# Altium PCB PCB 0901.PcbDoc (part 2 of 3)
Units mm, origin at the board's own origin, x right, y up, seen from the top; angles counter-clockwise.
Board outline 234.06 x 185.93 mm, 2 copper layers (Top Layer, Bottom Layer); 162 components, 256 nets, 1015 pads, 205 vias.
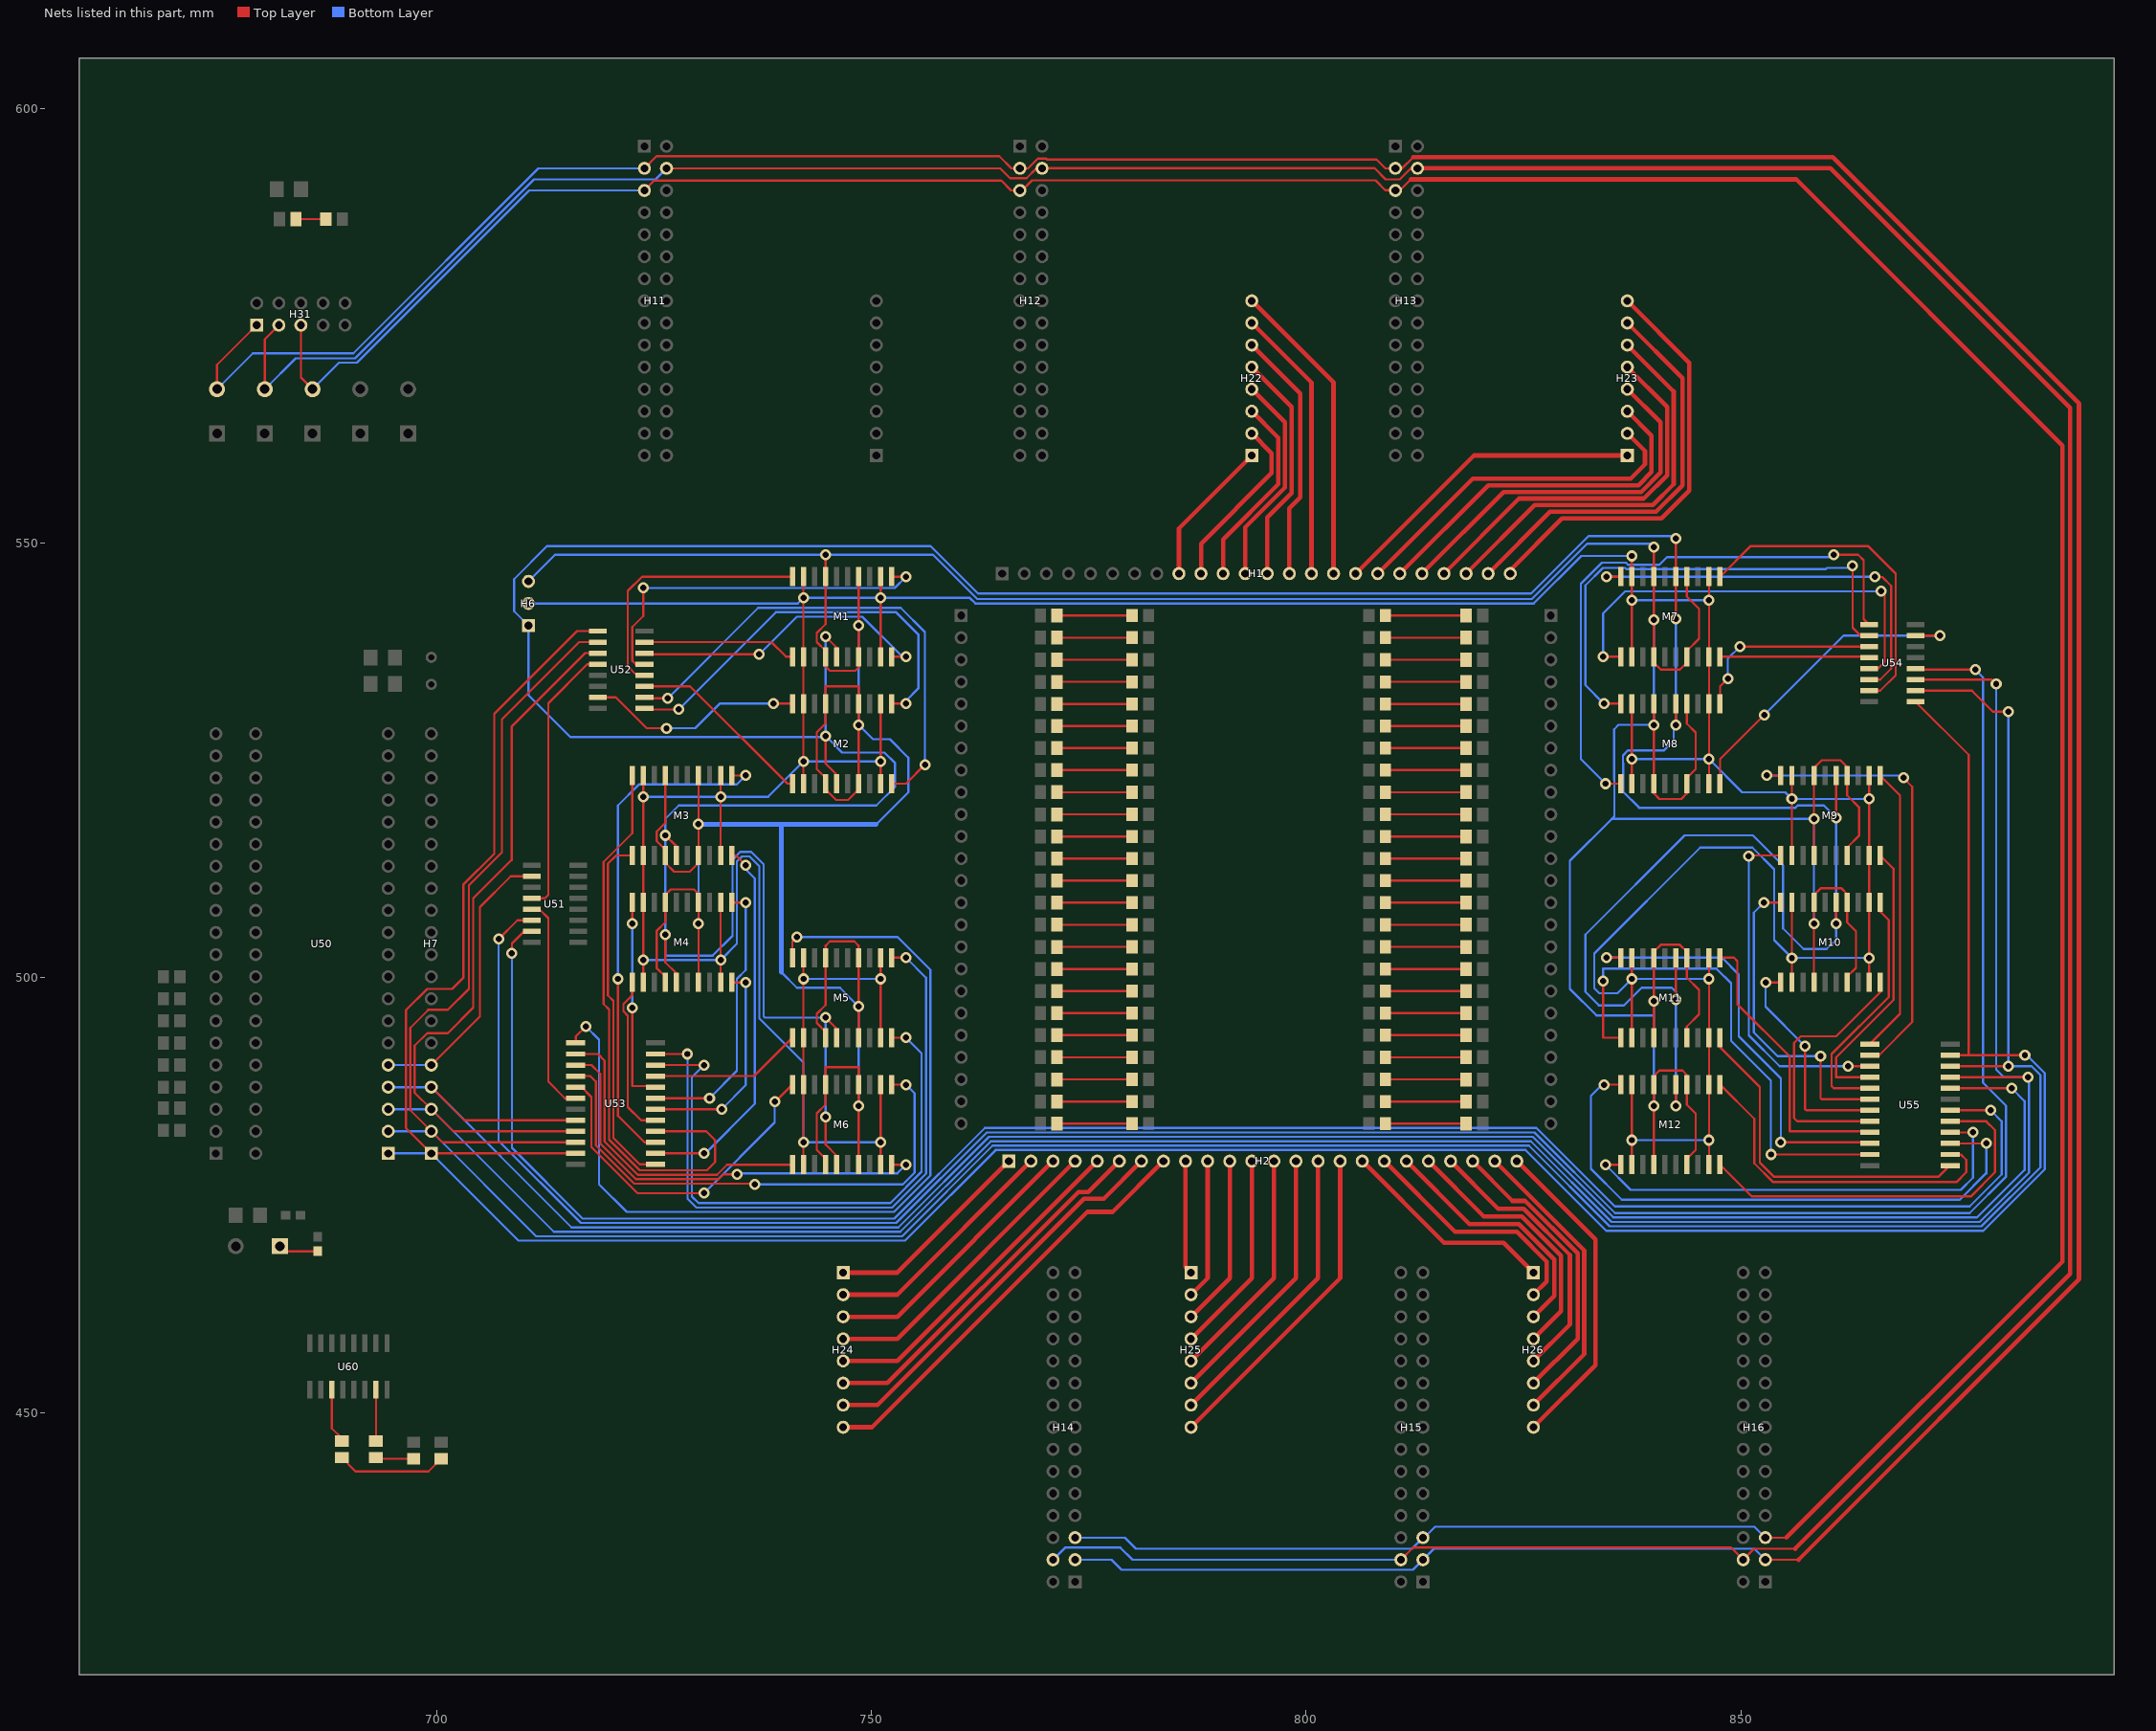
[diagram p2: the nets of this part, all layers, seen from the top]

## Via types
v1: diameter 1.27, hole 0.711, Top Layer to Bottom Layer, 205 vias

## Nets (pads, with @x,y where several pads share a name; then routed paths per layer and width w, separated by ;. In a path a pad name is that pad's centre, name@x,y a point inside that pad or via, vN(x,y) a via of type N, cw(c..) or ccw(c..) an arc to the next point about the centre after c; other vN are vias at no path point) (continued)
IN9: H1.9 H22.1 | length 17.1
  Top Layer w0.508: H1.9@785.368,546.481 785.368,551.687 H22.1@793.751,560.07
IN10: H1.10 H22.2 | length 20.4
  Top Layer w0.508: H1.10@787.908,546.481 787.908,549.91 796.036,558.038 796.036,560.325 H22.2@793.751,562.61
IN11: H1.11 H22.3 | length 22.6
  Top Layer w0.508: H1.11@790.448,546.481 790.448,550.418 796.798,556.768 796.798,562.103 H22.3@793.751,565.15
IN12: H1.12 H22.4 | length 24.7
  Top Layer w0.508: H1.12@792.988,546.481 792.988,551.815 797.56,556.387 797.56,563.881 H22.4@793.751,567.69
IN13: H1.13 H22.5 | length 26.8
  Top Layer w0.508: H22.5@793.751,570.23 798.322,565.659 798.322,555.752 795.528,552.958 H1.13@795.528,546.481
IN14: H1.14 H22.6 | length 29.1
  Top Layer w0.508: H22.6@793.751,572.77 799.338,567.183 799.338,555.244 798.068,553.974 H1.14@798.068,546.481
IN15: H1.15 H22.7 | length 31.7
  Top Layer w0.508: H22.7@793.751,575.31 800.608,568.453 H1.15@800.608,546.481
IN16: H1.16 H22.8 | length 35.3
  Top Layer w0.508: H22.8@793.751,577.85 803.148,568.453 H1.16@803.148,546.481
IN17: H1.17 H23.1 | length 36.9
  Top Layer w0.508: H1.17@805.688,546.481 819.277,560.07 H23.1@836.93,560.07
IN18: H1.18 H23.2 | length 40.3
  Top Layer w0.508: H1.18@808.228,546.481 819.15,557.403 837.311,557.403 838.962,559.054 838.962,560.578 H23.2@836.93,562.61
IN19: H1.19 H23.3 | length 41.9
  Top Layer w0.508: H1.19@810.768,546.481 820.928,556.641 838.2,556.641 839.724,558.165 839.724,562.356 H23.3@836.93,565.15
IN20: H1.20 H23.4 | length 43.4
  Top Layer w0.508: H1.20@813.308,546.481 822.706,555.879 838.519,555.879 840.74,558.1 840.74,563.88 H23.4@836.93,567.69
IN21: H1.21 H23.5 | length 44.7
  Top Layer w0.508: H1.21@815.848,546.481 824.484,555.117 838.835,555.117 841.502,557.784 841.502,565.658 H23.5@836.93,570.23
IN22: H1.22 H23.6 | length 46.3
  Top Layer w0.508: H1.22@818.388,546.481 826.262,554.355 839.851,554.355 842.264,556.768 842.264,567.436 H23.6@836.93,572.77
IN23: H1.23 H23.7 | length 47.9
  Top Layer w0.508: H1.23@820.928,546.481 828.04,553.593 840.232,553.593 843.28,556.641 843.28,568.96 H23.7@836.93,575.31
IN24: H1.24 H23.8 | length 49.5
  Top Layer w0.508: H1.24@823.468,546.481 823.468,546.862 829.437,552.831 840.867,552.831 844.042,556.006 844.042,570.738 H23.8@836.93,577.85
IN25: H2.1 H24.1 | length 24.4
  Top Layer w0.508: H24.1@746.754,466.096 752.989,466.096 H2.1@765.81,478.917
IN26: H2.2 H24.2 | length 28
  Top Layer w0.508: H24.2@746.754,463.556 752.989,463.556 H2.2@768.35,478.917
IN27: H2.3 H24.3 | length 31.6
  Top Layer w0.508: H24.3@746.754,461.016 752.989,461.016 H2.3@770.89,478.917
IN28: H2.4 H24.4 | length 35.1
  Top Layer w0.508: H24.4@746.754,458.476 752.989,458.476 H2.4@773.43,478.917
IN29: H2.5 H24.5 | length 38.7
  Top Layer w0.508: H24.5@746.754,455.936 752.989,455.936 H2.5@775.97,478.917
IN30: H2.6 H24.6 | length 42.3
  Top Layer w0.508: H24.6@746.754,453.396 751.846,453.396 773.811,475.361 774.954,475.361 H2.6@778.51,478.917
IN31: H2.7 H24.7 | length 45.9
  Top Layer w0.508: H24.7@746.754,450.856 750.703,450.856 774.446,474.599 776.732,474.599 H2.7@781.05,478.917
IN32: H2.8 H24.8 | length 49.5
  Top Layer w0.508: H24.8@746.754,448.316 750.068,448.316 774.827,473.075 777.748,473.075 H2.8@783.59,478.917
IN33: H2.9 H25.1 | length 13.1
  Top Layer w0.508: H2.9@786.13,478.917 786.13,466.725 H25.1@786.759,466.096
IN34: H2.10 H25.2 | length 16.2
  Top Layer w0.508: H25.2@786.759,463.556 788.67,465.468 H2.10@788.67,478.917
IN35: H2.11 H25.3 | length 19.7
  Top Layer w0.508: H25.3@786.759,461.016 791.21,465.468 H2.11@791.21,478.917
IN36: H2.12 H25.4 | length 23.3
  Top Layer w0.508: H25.4@786.759,458.476 793.75,465.468 H2.12@793.75,478.917
IN37: H2.13 H25.5 | length 26.9
  Top Layer w0.508: H25.5@786.759,455.936 796.29,465.468 H2.13@796.29,478.917
IN38: H2.14 H25.6 | length 30.5
  Top Layer w0.508: H25.6@786.759,453.396 798.83,465.468 H2.14@798.83,478.917
IN39: H2.15 H25.7 | length 34.1
  Top Layer w0.508: H25.7@786.759,450.856 801.37,465.468 H2.15@801.37,478.917
IN40: H2.16 H25.8 | length 37.7
  Top Layer w0.508: H25.8@786.759,448.316 803.91,465.468 H2.16@803.91,478.917
IN41: H2.17 H26.1 | length 25
  Top Layer w0.508: H2.17@806.45,478.917 815.848,469.519 822.706,469.519 H26.1@826.129,466.096
IN42: H2.18 H26.2 | length 27.9
  Top Layer w0.508: H2.18@808.99,478.917 817.118,470.789 824.23,470.789 827.659,467.36 827.659,465.087 H26.2@826.129,463.556
IN43: H2.19 H26.3 | length 29.3
  Top Layer w0.508: H2.19@811.53,478.917 818.769,471.678 824.484,471.678 828.548,467.614 828.548,463.436 H26.3@826.129,461.016
IN44: H2.20 H26.4 | length 30.6
  Top Layer w0.508: H2.20@814.07,478.917 820.42,472.567 824.807,472.567 829.31,468.064 829.31,461.658 H26.4@826.129,458.476
IN45: H2.21 H26.5 | length 32.1
  Top Layer w0.508: H2.21@816.61,478.917 822.071,473.456 824.996,473.456 830.326,468.126 830.326,460.134 H26.5@826.129,455.936
IN46: H2.22 H26.6 | length 33.5
  Top Layer w0.508: H2.22@819.15,478.917 823.722,474.345 825.184,474.345 831.215,468.314 831.215,458.483 H26.6@826.129,453.396
IN47: H2.23 H26.7 | length 34.7
  Top Layer w0.508: H2.23@821.69,478.917 831.977,468.63 831.977,456.705 H26.7@826.129,450.856
IN48: H2.24 H26.8 | length 37.3
  Top Layer w0.508: H2.24@824.23,478.917 833.247,469.9 833.247,455.435 H26.8@826.129,448.316
NetDS1_2: DS1.2 R51.1 | length 8.6
  Top Layer w0.254: DS1.2@771.332,541.655 R51.1@779.973,541.655
NetDS2_2: DS2.2 R52.1 | length 9.3
  Top Layer w0.254: R52.1@809.117,541.655 DS2.2@818.393,541.655
NetDS3_2: DS3.2 R53.1 | length 8.6
  Top Layer w0.254: DS3.2@771.332,539.115 R53.1@779.973,539.115
NetDS4_2: DS4.2 R54.1 | length 9.3
  Top Layer w0.254: R54.1@809.117,539.115 DS4.2@818.393,539.115
NetDS5_2: DS5.2 R55.1 | length 8.6
  Top Layer w0.254: DS5.2@771.332,536.575 R55.1@779.973,536.575
NetDS6_2: DS6.2 R56.1 | length 9.3
  Top Layer w0.254: R56.1@809.117,536.575 DS6.2@818.393,536.575
NetDS7_2: DS7.2 R57.1 | length 8.6
  Top Layer w0.254: DS7.2@771.332,534.035 R57.1@779.973,534.035
NetDS8_2: DS8.2 R58.1 | length 9.3
  Top Layer w0.254: R58.1@809.244,534.035 DS8.2@818.52,534.035
NetDS9_2: DS9.2 R59.1 | length 8.6
  Top Layer w0.254: DS9.2@771.332,531.495 R59.1@779.973,531.495
NetDS10_2: DS10.2 R60.1 | length 9.3
  Top Layer w0.254: R60.1@809.117,531.495 DS10.2@818.393,531.495
NetDS11_2: DS11.2 R61.1 | length 8.6
  Top Layer w0.254: DS11.2@771.332,528.955 R61.1@779.973,528.955
NetDS12_2: DS12.2 R62.1 | length 9.3
  Top Layer w0.254: R62.1@809.117,528.955 DS12.2@818.393,528.955
NetDS13_2: DS13.2 R63.1 | length 8.6
  Top Layer w0.254: DS13.2@771.332,526.415 R63.1@779.973,526.415
NetDS14_2: DS14.2 R64.1 | length 9.3
  Top Layer w0.254: R64.1@809.244,526.415 DS14.2@818.52,526.415
NetDS15_2: DS15.2 R65.1 | length 8.6
  Top Layer w0.254: DS15.2@771.332,523.875 R65.1@779.973,523.875
NetDS16_2: DS16.2 R66.1 | length 9.3
  Top Layer w0.254: R66.1@809.117,523.875 DS16.2@818.393,523.875
NetDS17_2: DS17.2 R67.1 | length 8.6
  Top Layer w0.254: DS17.2@771.332,521.335 R67.1@779.973,521.335
NetDS18_2: DS18.2 R68.1 | length 9.3
  Top Layer w0.254: R68.1@809.117,521.335 DS18.2@818.393,521.335
NetDS19_2: DS19.2 R69.1 | length 8.6
  Top Layer w0.254: DS19.2@771.332,518.795 R69.1@779.973,518.795
NetDS20_2: DS20.2 R70.1 | length 9.3
  Top Layer w0.254: R70.1@809.244,518.795 DS20.2@818.52,518.795
NetDS21_2: DS21.2 R71.1 | length 8.6
  Top Layer w0.254: DS21.2@771.332,516.255 R71.1@779.973,516.255
NetDS22_2: DS22.2 R72.1 | length 9.3
  Top Layer w0.254: R72.1@809.117,516.255 DS22.2@818.393,516.255
NetDS23_2: DS23.2 R73.1 | length 8.6
  Top Layer w0.254: DS23.2@771.332,513.715 R73.1@779.973,513.715
NetDS24_2: DS24.2 R74.1 | length 9.3
  Top Layer w0.254: R74.1@809.117,513.715 DS24.2@818.393,513.715
NetDS25_2: DS25.2 R75.1 | length 8.6
  Top Layer w0.254: DS25.2@771.332,511.175 R75.1@779.973,511.175
NetDS26_2: DS26.2 R76.1 | length 9.3
  Top Layer w0.254: R76.1@809.117,511.175 DS26.2@818.393,511.175
NetDS27_2: DS27.2 R77.1 | length 8.6
  Top Layer w0.254: DS27.2@771.332,508.635 R77.1@779.973,508.635
NetDS28_2: DS28.2 R78.1 | length 9.3
  Top Layer w0.254: R78.1@809.117,508.635 DS28.2@818.393,508.635
NetDS29_2: DS29.2 R79.1 | length 8.6
  Top Layer w0.254: DS29.2@771.332,506.095 R79.1@779.973,506.095
NetDS30_2: DS30.2 R80.1 | length 9.3
  Top Layer w0.254: R80.1@809.117,506.095 DS30.2@818.393,506.095
NetDS31_2: DS31.2 R81.1 | length 8.6
  Top Layer w0.254: DS31.2@771.332,503.555 R81.1@779.973,503.555
NetDS32_2: DS32.2 R82.1 | length 9.3
  Top Layer w0.254: R82.1@809.117,503.555 DS32.2@818.393,503.555
NetDS33_2: DS33.2 R83.1 | length 8.6
  Top Layer w0.254: DS33.2@771.332,501.015 R83.1@779.973,501.015
NetDS34_2: DS34.2 R84.1 | length 9.3
  Top Layer w0.254: R84.1@809.117,501.015 DS34.2@818.393,501.015
NetDS35_2: DS35.2 R85.1 | length 8.6
  Top Layer w0.254: DS35.2@771.332,498.475 R85.1@779.973,498.475
NetDS36_2: DS36.2 R86.1 | length 9.3
  Top Layer w0.254: R86.1@809.117,498.475 DS36.2@818.393,498.475
NetDS37_2: DS37.2 R87.1 | length 8.6
  Top Layer w0.254: DS37.2@771.332,495.935 R87.1@779.973,495.935
NetDS38_2: DS38.2 R88.1 | length 9.3
  Top Layer w0.254: R88.1@809.117,495.935 DS38.2@818.393,495.935
NetDS39_2: DS39.2 R89.1 | length 8.6
  Top Layer w0.254: DS39.2@771.332,493.395 R89.1@779.973,493.395
NetDS40_2: DS40.2 R90.1 | length 9.3
  Top Layer w0.254: R90.1@809.117,493.395 DS40.2@818.393,493.395
NetDS41_2: DS41.2 R91.1 | length 8.6
  Top Layer w0.254: DS41.2@771.332,490.855 R91.1@779.973,490.855
NetDS42_2: DS42.2 R92.1 | length 9.3
  Top Layer w0.254: R92.1@809.117,490.855 DS42.2@818.393,490.855
NetDS43_2: DS43.2 R93.1 | length 8.6
  Top Layer w0.254: DS43.2@771.332,488.315 R93.1@779.973,488.315
NetDS44_2: DS44.2 R94.1 | length 9.3
  Top Layer w0.254: R94.1@809.244,488.315 DS44.2@818.52,488.315
NetDS45_2: DS45.2 R95.1 | length 8.6
  Top Layer w0.254: DS45.2@771.332,485.775 R95.1@779.973,485.775
NetDS46_2: DS46.2 R96.1 | length 9.3
  Top Layer w0.254: R96.1@808.99,485.775 DS46.2@818.266,485.775
NetDS47_2: DS47.2 R97.1 | length 8.6
  Top Layer w0.254: DS47.2@771.332,483.235 R97.1@779.973,483.235
NetDS48_2: DS48.2 R98.1 | length 9.3
  Top Layer w0.254: R98.1@809.244,483.235 DS48.2@818.52,483.235
NetDS50_1: DS50.1 R20.1 | length 4.2
  Top Layer w0.254: DS50.1@693.166,444.693 R20.1@697.357,444.693
NetDS50_2: DS50.2 U60.15 | length 5.9
  Top Layer w0.254: DS50.2@693.039,446.72 U60.15@693.039,452.62
NetDS54_1: DS54.1 R24.1 | length 12.7
  Top Layer w0.254: DS54.1@689.102,444.82 690.692,443.23 699.069,443.23 R24.1@700.532,444.693
NetDS54_2: DS54.2 U60.11 | length 6.4
  Top Layer w0.254: U60.11@687.959,452.62 687.959,448.183 689.102,447.04 DS54.2@689.102,446.72
NetDS55_2: DS55.2 R31.2 | length 3.4
  Top Layer w0.254: DS55.2@683.829,587.248 R31.2@687.263,587.248
NetH6_1: H6.1 M1.5 M2.5 M3.5 M4.5 M5.5 M6.5 M7.5 M8.5 M9.5 M10.5 M11.5 M12.5 | length 508.4
  Top Layer w0.254: v1(726.313,504.952) 726.313,501.777 727.583,500.507 M4.5@727.583,499.463 ; v1(726.313,516.382) 727.583,515.112 M3.5@727.583,514.068 ; v1(744.728,483.997) 744.728,480.822 745.998,479.552 M6.5@745.998,478.508 ; v1(744.728,495.427) 745.998,494.157 M5.5@745.998,493.113 ; v1(744.728,527.812) 744.728,524.637 745.998,523.367 M2.5@745.998,522.323 ; v1(744.728,539.242) 745.998,537.972 M1.5@745.998,536.928 ; v1(842.518,485.267) M12.5@842.518,487.708 ; v1(842.518,497.459) M11.5@842.518,502.313 ; v1(842.518,529.082) M8.5@842.518,531.523 ; v1(842.518,541.274) M7.5@842.518,546.128 v1(842.518,550.545) ; v1(860.933,506.222) M10.5@860.933,508.663 ; v1(860.933,518.414) M9.5@860.933,523.268
  Bottom Layer w0.254: v1(744.728,483.997) v1(744.728,495.427) 737.743,495.427 737.616,495.554 737.616,513.048 736.187,514.477 734.925,514.477 734.032,513.584 734.032,504.837 731.734,502.539 726.44,502.539 726.313,502.666 v1(726.313,504.952) v1(726.313,516.382) 726.313,518.287 727.837,519.811 750.57,519.811 752.729,521.97 752.729,524.677 751.499,525.907 746.633,525.907 v1(744.728,527.812) ; v1(744.728,539.242) v1(744.728,527.812) ; v1(842.518,485.267) v1@842.518,497.332 ; v1(842.518,497.459) 842.518,498.392 842.054,498.856 838.577,498.856 836.545,496.824 833.668,496.824 832.104,498.388 832.104,504.952 843.534,516.382 851.361,516.382 854.837,512.906 854.837,505.67 857.206,503.301 859.834,503.301 860.933,504.4 v1(860.933,506.222) v1@860.933,518.287 ; v1@842.518,541.147 v1(842.518,529.082) 842.264,528.828 842.264,527.264 841.161,526.161 837.017,526.161 836.422,525.566 836.422,524.724 836.45,524.696 836.45,521.394 838.287,519.557 856.274,519.557 856.528,519.811 859.536,519.811 v1(860.933,518.414) ; v1(842.518,550.545) 842.264,550.799 832.481,550.799 825.877,544.195 762.258,544.195 756.797,549.656 712.724,549.656 708.914,545.846 708.914,542.163 H6.1@710.565,540.512 710.565,532.511 715.391,527.685 744.601,527.685 v1(744.728,527.812)
NetH6_2: H6.2 M1.2 M1.9 M1.12 M1.19 M2.2 M2.9 M2.12 M2.19 M3.2 M3.9 M3.12 M3.19 M4.2 M4.9 M4.12 M4.19 M5.2 M5.9 M5.12 M5.19 M6.2 M6.9 M6.12 M6.19 M7.2 M7.9 M7.12 M7.19 M8.2 M8.9 M8.12 M8.19 M9.2 M9.9 M9.12 M9.19 M10.2 M10.9 M10.12 M10.19 M11.2 M11.9 M11.12 M11.19 M12.2 M12.9 M12.12 M12.19 | length 601.7
  Top Layer w0.254: M4.2@723.773,499.463 v1(723.773,502.031) M4.19@723.773,508.663 M3.2@723.773,514.068 v1(723.773,520.827) M3.19@723.773,523.268 ; M4.9@732.663,499.463 v1(732.663,502.031) M4.12@732.663,508.663 ; M3.9@732.663,514.068 v1(732.663,520.827) M3.12@732.663,523.268 ; M6.2@742.188,478.508 v1(742.188,481.076) M6.19@742.188,487.708 M5.2@742.188,493.113 v1(742.188,499.872) M5.19@742.188,502.313 ; M2.2@742.188,522.323 v1(742.188,524.891) M2.19@742.188,531.523 M1.2@742.188,536.928 v1(742.188,543.687) M1.19@742.188,546.128 ; M6.9@751.078,478.508 v1(751.078,481.076) M6.12@751.078,487.708 ; M5.9@751.078,493.113 v1(751.078,499.872) M5.12@751.078,502.313 ; M2.9@751.078,522.323 v1(751.078,524.891) M2.12@751.078,531.523 ; M1.9@751.078,536.928 v1(751.078,543.687) M1.12@751.078,546.128 ; M12.12@837.438,478.508 v1(837.438,481.33) M12.9@837.438,487.708 ; M11.12@837.438,493.113 v1(837.438,499.872) M11.9@837.438,502.313 ; M8.12@837.438,522.323 v1(837.438,525.145) M8.9@837.438,531.523 ; M7.12@837.438,536.928 v1(837.438,543.433) M7.9@837.438,546.128 v1(837.438,548.513) ; M12.19@846.328,478.508 v1(846.328,481.33) M12.2@846.328,487.708 M11.19@846.328,493.113 v1(846.328,499.872) M11.2@846.328,502.313 ; M8.19@846.328,522.323 v1(846.328,525.145) M8.2@846.328,531.523 M7.19@846.328,536.928 v1(846.328,543.433) M7.2@846.328,546.1 ; M10.12@855.853,499.463 v1(855.853,502.285) M10.9@855.853,508.663 ; M9.12@855.853,514.068 v1(855.853,520.573) M9.9@855.853,523.268 ; M10.19@864.743,499.463 v1(864.743,502.285) M9.19@864.743,514.068 v1(864.743,520.573) M9.2@864.743,523.268
  Bottom Layer w0.254: H6.2@710.819,543.052 741.553,543.052 v1(742.188,543.687) v1(751.078,543.687) 761.329,543.687 761.964,543.052 826.171,543.052 831.632,548.513 v1(837.438,548.513) ; v1(723.773,502.031) v1(732.663,502.031) 734.54,503.908 734.54,513.374 735.135,513.969 735.977,513.969 737.108,512.838 737.108,495.344 742.188,490.264 v1(742.188,481.076) v1(751.078,481.076) ; v1(723.773,520.827) v1(732.663,520.827) 738.124,520.827 v1(742.188,524.891) v1(751.078,524.891) ; v1(742.188,499.872) v1(751.078,499.872) ; v1(837.438,481.33) v1(846.328,481.33) ; v1(837.438,525.145) v1(846.328,525.145) 850.138,521.335 855.091,521.335 v1(855.853,520.573) v1(864.743,520.573) ; v1(837.438,543.433) v1(846.328,543.433) ; v1(846.328,499.872) v1(837.438,499.872) 835.787,498.221 833.708,498.221 833.12,498.809 833.12,502.793 845.312,514.985 851.321,514.985 853.821,512.485 853.821,504.317 v1(855.853,502.285) v1(864.743,502.285)
NetH6_3: H6.3 M1.4 M1.7 M1.14 M1.17 M2.4 M2.7 M2.14 M2.17 M3.4 M3.7 M3.14 M3.17 M4.4 M4.7 M4.14 M4.17 M5.4 M5.7 M5.14 M5.17 M6.4 M6.7 M6.14 M6.17 M7.4 M7.7 M7.14 M7.17 M8.4 M8.7 M8.14 M8.17 M9.4 M9.7 M9.14 M9.17 M10.4 M10.7 M10.14 M10.17 M11.4 M11.7 M11.14 M11.17 M12.4 M12.7 M12.14 M12.17 | length 662.8
  Top Layer w0.254: M4.4@726.313,499.463 726.313,500.132 725.297,501.148 725.297,505.373 726.313,506.389 M4.17@726.313,508.663 726.313,509.524 726.948,510.159 729.615,510.159 730.123,509.651 M4.14@730.123,508.663 v1(730.123,506.222) M4.7@730.123,499.463 ; M3.17@726.313,523.268 726.313,517.819 725.297,516.803 725.297,515.753 726.313,514.737 M3.4@726.313,514.068 726.313,513.207 727.329,512.191 729.107,512.191 730.123,513.207 M3.7@730.123,514.068 v1(730.123,517.652) M3.14@730.123,523.268 ; M6.4@744.728,478.508 744.728,479.177 743.712,480.193 743.712,484.418 744.728,485.434 M6.17@744.728,487.708 744.728,489.712 748.538,489.712 M6.14@748.538,487.708 v1(748.538,485.267) M6.7@748.538,478.508 ; M5.4@744.728,493.113 744.728,493.782 743.712,494.798 743.712,495.848 744.728,496.864 M5.17@744.728,502.313 744.728,503.682 745.236,504.19 748.03,504.19 748.538,503.682 M5.14@748.538,502.313 v1(748.538,496.697) M5.7@748.538,493.113 ; v1(744.728,548.64) M1.17@744.728,546.128 744.728,540.679 743.712,539.663 743.712,538.613 744.728,537.597 M1.4@744.728,536.928 744.728,535.813 745.236,535.305 748.157,535.305 748.538,535.686 M1.7@748.538,536.928 v1(748.538,540.512) M1.14@748.538,546.128 ; M12.14@839.978,478.508 v1(839.978,485.267) M12.7@839.978,487.708 839.978,488.696 840.613,489.331 843.28,489.331 843.788,488.823 M12.4@843.788,488.377 ; M11.14@839.978,493.113 v1(839.978,497.332) M11.7@839.978,502.313 839.978,502.982 840.79,503.794 842.976,503.794 843.788,502.982 M11.4@843.788,502.313 843.788,500.013 845.185,498.616 845.185,495.808 843.788,494.411 M11.17@843.788,493.113 ; M8.7@839.978,531.523 v1(839.978,529.082) M8.14@839.978,522.323 839.978,521.208 840.613,520.573 843.153,520.573 843.788,521.208 M8.17@843.788,522.323 843.788,522.992 844.804,524.008 844.804,528.207 843.788,529.223 M8.4@843.788,531.523 ; v1(839.978,549.529) M7.7@839.978,546.128 v1(839.978,541.147) M7.14@839.978,536.928 839.978,536.259 840.79,535.447 842.976,535.447 843.788,536.259 M7.17@843.788,536.928 843.788,537.597 845.185,538.994 845.185,542.431 843.788,543.828 M7.4@843.788,546.128 ; M12.17@843.788,478.508 843.788,479.177 844.804,480.193 844.804,484.392 843.788,485.408 M12.4@843.788,487.708 ; M10.14@858.393,499.463 v1(858.393,506.222) 858.393,509.524 859.155,510.286 861.568,510.286 862.203,509.651 M10.4@862.203,509.332 ; M9.14@858.393,514.068 v1(858.393,518.287) M9.7@858.393,523.268 858.393,524.129 859.282,525.018 861.441,525.018 862.203,524.256 M9.4@862.203,523.268 862.203,520.968 863.6,519.571 863.6,516.382 862.203,514.985 M9.17@862.203,514.068 ; M10.17@862.203,499.463 862.203,500.132 863.219,501.148 863.219,505.347 862.203,506.363 M10.4@862.203,508.663 ; 743.712,524.008 744.728,522.992 M2.4@744.728,522.323 744.728,521.654 745.936,520.446 747.33,520.446 748.538,521.654 M2.7@748.538,522.323 v1(748.538,529.082) M2.14@748.538,531.523 748.538,533.527 744.728,533.527 M2.17@744.728,531.523 744.728,529.249 743.712,528.233 743.712,524.008
  Bottom Layer w0.254: H6.3@710.565,545.592 713.613,548.64 v1(744.728,548.64) 757.094,548.64 762.174,543.56 825.961,543.56 832.311,549.91 839.597,549.91 v1(839.978,549.529) ; v1(730.123,506.222) v1(730.123,517.652) ; 739.648,500.634 741.426,498.856 746.379,498.856 v1(748.538,496.697) v1(748.538,485.267) ; v1(748.538,540.512) v1(748.538,529.082) 750.189,527.431 752.13,527.431 754.253,525.308 754.253,521.339 750.566,517.652 ; v1(839.978,485.267) 839.978,495.681 ; v1(839.978,497.332) 839.978,495.681 ; v1(839.978,541.147) v1(839.978,529.082) 835.914,529.082 835.406,528.574 835.406,522.772 835.434,522.744 835.434,518.569 835.152,518.287 ; v1(858.393,506.222) v1(858.393,518.287) 835.152,518.287 ; 835.152,518.287 830.326,513.461 830.326,498.729 833.374,495.681 839.978,495.681
  Bottom Layer w0.508: v1(730.123,517.652) 750.566,517.652 ; 739.648,500.634 739.648,517.652
NetM1_1: M1.1 U52.15 | length 17.7
  Top Layer w0.254: U52.15@723.908,538.607 738.505,538.607 740.184,536.928 M1.1@740.918,536.928
NetM1_10: M1.10 U52.14 | length 35.3
  Top Layer w0.254: U52.14@724.035,537.21 v1(737.108,537.21) ; M1.10@752.348,536.928 v1(753.971,536.928)
  Bottom Layer w0.254: v1(737.108,537.21) 741.426,541.528 748.959,541.528 753.559,536.928 v1(753.971,536.928)
NetM1_11: M1.11 U52.13 | length 42.8
  Top Layer w0.254: v1(723.773,544.83) 723.773,541.606 722.502,540.335 722.502,536.449 722.884,536.067 U52.13@723.908,536.067 ; M1.11@752.348,546.128 v1(753.971,546.128)
  Bottom Layer w0.254: v1(723.773,544.83) 752.673,544.83 v1(753.971,546.128)
NetM1_20: M1.20 U52.12 | length 30.6
  Top Layer w0.254: U52.12@723.908,534.797 723.011,534.797 721.994,535.814 721.994,544.488 723.634,546.128 M1.20@740.918,546.128
NetM2_1: M2.1 U52.11 | length 21.7
  Top Layer w0.254: U52.11@723.908,533.527 729.147,533.527 740.351,522.323 M2.1@740.918,522.323
NetM2_10: M2.10 U52.10 | length 57.5
  Top Layer w0.254: U52.10@724.035,532.13 v1(726.567,532.13) ; M2.10@752.348,522.323 753.971,522.323 v1(756.158,524.51)
  Bottom Layer w0.254: v1(726.567,532.13) 736.981,542.544 753.364,542.544 756.158,539.75 v1(756.158,524.51)
NetM2_11: M2.11 U52.9 | length 47.2
  Top Layer w0.254: U52.9@724.035,530.86 v1(727.837,530.86) ; M2.11@752.348,531.523 v1(753.971,531.523)
  Bottom Layer w0.254: v1(727.837,530.86) 739.013,542.036 752.856,542.036 755.396,539.496 755.396,533.273 753.971,531.848 v1(753.971,531.523)
NetM2_20: M2.20 U52.7 | length 25
  Top Layer w0.254: U52.7@718.558,532.257 720.598,532.257 724.154,528.701 v1(726.44,528.701) ; v1(738.731,531.523) M2.20@740.918,531.523
  Bottom Layer w0.254: v1(726.44,528.701) 729.742,528.701 732.564,531.523 v1(738.731,531.523)
NetM3_1: M3.1 U53.1 | length 41.1
  Top Layer w0.254: M3.1@722.503,514.068 720.653,514.068 719.709,513.124 719.709,497.967 720.344,497.332 720.344,481.584 723.392,478.536 U53.1@725.198,478.536
NetM3_10: M3.10 U53.2 | length 44.1
  Top Layer w0.254: U53.2@725.198,479.806 v1(730.758,479.806) ; M3.10@733.933,514.068 734.441,514.068 v1(735.556,512.953)
  Bottom Layer w0.254: v1@730.377,479.806 730.885,479.806 736.6,485.521 736.6,511.429 735.556,512.473 v1(735.556,512.953)
NetM3_11: M3.11 U53.3 | length 59.2
  Top Layer w0.254: v1(720.852,499.872) 720.852,484.124 723.9,481.076 U53.3@725.198,481.076 ; M3.11@733.933,523.268 v1(735.556,523.268)
  Bottom Layer w0.254: v1@720.852,499.745 v1(720.852,499.872) 720.852,519.811 723.265,522.224 734.512,522.224 v1(735.556,523.268)
NetM3_20: M3.20 U53.4 | length 67.4
  Top Layer w0.254: M3.20@722.503,523.268 722.503,516.636 719.201,513.334 719.201,496.995 719.836,496.36 719.836,481.374 723.355,477.855 731.093,477.855 732.028,478.79 732.028,481.33 731.012,482.346 U53.4@725.198,482.346
NetM4_1: M4.1 U53.5 | length 18.8
  Top Layer w0.254: M4.1@722.503,499.463 722.503,498.007 721.487,496.991 721.487,496.149 721.995,495.641 721.995,485.14 723.519,483.616 U53.5@725.198,483.616
NetM4_10: M4.10 U53.6 | length 24.9
  Top Layer w0.254: U53.6@725.198,484.886 v1(732.79,484.886) ; M4.10@733.933,499.463 v1(735.556,499.463)
  Bottom Layer w0.254: v1(732.79,484.886) 735.556,487.652 v1(735.556,499.463)
NetM4_11: M4.11 U53.7 | length 32
  Top Layer w0.254: U53.7@725.198,486.156 v1(731.393,486.156) ; M4.11@733.933,508.663 v1(735.556,508.663)
  Bottom Layer w0.254: v1(731.393,486.156) 734.54,489.303 734.54,499.884 735.556,500.9 v1(735.556,508.663)
NetM4_20: M4.20 U53.8 | length 23.9
  Top Layer w0.254: v1(722.503,496.57) 722.503,487.553 725.071,487.553 U53.8@725.198,487.426 ; v1(722.503,506.222) M4.20@722.503,508.663
  Bottom Layer w0.254: v1(722.503,496.57) v1(722.503,506.222)
NetM5_1: M5.1 U53.9 | length 17.5
  Top Layer w0.254: U53.9@725.198,488.696 736.501,488.696 M5.1@740.918,493.113
NetM5_10: M5.10 U53.10 | length 67.3
  Top Layer w0.254: U53.10@725.198,489.966 v1(730.758,489.966) ; M5.10@752.348,493.113 v1(753.971,493.113)
  Bottom Layer w0.254: v1(730.758,489.966) 729.361,488.569 729.361,474.853 730.123,474.091 752.181,474.091 755.777,477.687 755.777,491.307 v1(753.971,493.113)
NetM5_11: M5.11 U53.11 | length 77.2
  Top Layer w0.254: U53.11@725.198,491.236 v1(728.853,491.236) ; M5.11@752.348,502.313 v1(753.971,502.313)
  Bottom Layer w0.254: v1(728.853,491.236) 728.853,474.599 729.869,473.583 752.392,473.583 756.285,477.476 756.285,499.999 v1(753.971,502.313)
NetM5_20: M5.20 U53.13 | length 105.5
  Top Layer w0.254: U53.13@715.998,492.506 715.998,493.24 v1(717.169,494.411) ; M5.20@740.918,502.313 740.918,504.19 v1(741.426,504.698)
  Bottom Layer w0.254: v1(717.169,494.411) 718.693,492.887 718.693,476.25 721.868,473.075 752.602,473.075 756.793,477.266 756.793,500.928 753.023,504.698 v1(741.426,504.698)
NetM6_1: M6.1 U53.14 | length 36.6
  Top Layer w0.254: U53.14@715.998,491.236 718.566,491.236 719.328,490.474 719.328,481.163 723.144,477.347 732.238,477.347 733.399,478.508 M6.1@740.918,478.508
NetM6_10: M6.10 U53.15 | length 50.4
  Top Layer w0.254: U53.15@715.998,489.966 717.804,489.966 718.82,488.95 718.82,480.953 722.934,476.839 732.449,476.839 733.003,477.393 v1(734.568,477.393) ; M6.10@752.348,478.508 v1(753.971,478.508)
  Bottom Layer w0.254: v1(734.568,477.393) 734.695,477.52 752.983,477.52 v1(753.971,478.508)
NetM6_11: M6.11 U53.16 | length 61.1
  Top Layer w0.254: U53.16@715.998,488.696 717.677,488.696 718.312,488.061 718.312,480.742 722.723,476.331 736.519,476.331 v1(736.6,476.25) ; M6.11@752.348,487.708 v1(753.971,487.708)
  Bottom Layer w0.254: v1(736.6,476.25) 753.622,476.25 754.987,477.615 754.987,486.692 v1(753.971,487.708)
NetM6_20: M6.20 U53.17 | length 39.9
  Top Layer w0.254: U53.17@715.998,487.426 716.667,487.426 717.804,486.289 717.804,480.532 723.102,475.234 v1(730.758,475.234) ; v1(738.886,485.775) 738.985,485.775 M6.20@740.918,487.708
  Bottom Layer w0.254: v1(730.758,475.234) 738.886,483.362 v1(738.886,485.775)
NetM7_1: M7.1 U54.15 | length 38.4
  Top Layer w0.254: M7.1@847.598,546.128 851.126,549.656 864.616,549.656 867.791,546.481 867.791,534.797 866.013,533.019 U54.15@864.735,533.019
NetM7_10: M7.10 U54.14 | length 47.4
  Top Layer w0.254: v1(834.545,546.128) M7.10@836.168,546.128 ; U54.14@864.735,534.289 866.013,534.289 867.283,535.559 867.283,545.084 866.267,546.1 v1(865.378,546.1)
  Bottom Layer w0.254: v1(834.545,546.128) v1@865.378,546.128
NetM7_11: M7.11 U54.13 | length 50.5
  Top Layer w0.254: v1(834.136,536.928) M7.11@836.168,536.928 ; U54.13@864.735,535.559 865.759,535.559 866.521,536.321 866.521,544.068 v1(866.14,544.449)
  Bottom Layer w0.254: v1(834.136,536.928) 834.136,541.909 836.676,544.449 v1(866.14,544.449)
NetM7_20: M7.20 U54.12 | length 17
  Top Layer w0.254: M7.20@847.598,536.928 U54.12@864.636,536.928
NetM8_1: M8.1 U54.11 | length 22.4
  Top Layer w0.254: M8.1@847.598,531.523 847.598,533.527 v1(848.487,534.416) ; v1(849.884,538.099) U54.11@864.735,538.099
  Bottom Layer w0.254: v1(848.487,534.416) 848.487,536.702 v1(849.884,538.099)
NetM8_10: M8.10 U54.10 | length 57.6
  Top Layer w0.254: v1(834.235,531.523) M8.10@836.168,531.523 ; v1(862.838,547.37) 862.838,540.258 863.727,539.369 U54.10@864.735,539.369
  Bottom Layer w0.254: v1(834.235,531.523) 832.104,533.654 832.104,545.124 834.124,547.144 836.652,547.144 836.807,546.989 859.746,546.989 859.901,547.144 862.612,547.144 v1(862.838,547.37)
NetM8_11: M8.11 U54.9 | length 67.9
  Top Layer w0.254: v1(834.418,522.323) M8.11@836.168,522.323 ; v1(860.679,548.64) 863.473,548.64 864.108,548.005 864.108,541.266 U54.9@864.735,540.639
  Bottom Layer w0.254: v1(834.418,522.323) 831.596,525.145 831.596,545.334 834.013,547.751 836.763,547.751 837.017,547.497 840.613,547.497 841.502,548.386 860.425,548.386 v1(860.679,548.64)
NetM8_20: M8.20 U54.7 | length 36.8
  Top Layer w0.254: M8.20@847.598,522.323 847.598,525.145 v1(852.678,530.225) ; U54.7@870.085,539.369 v1(872.871,539.369)
  Bottom Layer w0.254: v1(852.678,530.225) 861.822,539.369 v1(872.871,539.369)
NetM9_1: M9.1 U55.1 | length 33.3
  Top Layer w0.254: U55.1@864.81,492.379 868.299,495.868 868.299,520.982 M9.1@866.013,523.268
NetM9_10: M9.10 U55.2 | length 51.3
  Top Layer w0.254: v1(852.96,523.268) M9.10@854.583,523.268 ; U55.2@865.886,491.109 869.696,494.919 869.696,521.97 v1(868.68,522.986)
  Bottom Layer w0.254: v1(852.96,523.268) 868.398,523.268 v1(868.68,522.986)
NetM9_11: M9.11 U55.3 | length 39.8
  Top Layer w0.254: v1(850.9,513.969) 850.999,514.068 M9.11@854.583,514.068 ; v1(862.33,489.839) U55.3@864.842,489.839
  Bottom Layer w0.254: v1@850.9,514.096 v1(850.9,513.969) 850.9,493.395 854.456,489.839 v1(862.33,489.839)
NetM9_20: M9.20 U55.4 | length 32.7
  Top Layer w0.254: U55.4@864.81,488.569 860.933,488.569 860.933,490.855 867.537,497.459 867.537,512.544 M9.20@866.013,514.068
NetM10_1: M10.1 U55.5 | length 28.7
  Top Layer w0.254: U55.5@864.81,487.299 860.679,487.299 860.425,487.553 860.425,491.236 866.987,497.798 866.987,506.645 866.013,507.619 M10.1@866.013,508.663
NetM10_10: M10.10 U55.6 | length 36.7
  Top Layer w0.254: v1(852.65,508.663) M10.10@854.583,508.663 ; v1(859.155,490.982) 859.155,486.156 859.282,486.029 U55.6@864.81,486.029
  Bottom Layer w0.254: v1(852.65,508.663) 851.479,507.492 851.479,493.705 854.202,490.982 v1(859.155,490.982)
NetM10_11: M10.11 U55.7 | length 25.7
  Top Layer w0.254: v1(852.833,499.463) M10.11@854.583,499.463 ; v1(857.377,492.125) 857.377,484.886 857.504,484.759 U55.7@864.81,484.759
  Bottom Layer w0.254: v1(852.833,499.463) 852.833,496.669 v1(857.377,492.125)
NetM10_20: M10.20 U55.8 | length 30.9
  Top Layer w0.254: U55.8@864.81,483.489 856.488,483.489 856.107,483.87 856.107,492.506 856.869,493.268 860.933,493.268 866.013,498.348 M10.20@866.013,499.463
NetM11_1: M11.1 U55.9 | length 33.3
  Top Layer w0.254: M11.1@847.598,502.313 849.181,502.313 849.587,501.907 849.587,496.966 855.599,490.954 855.599,482.346 U55.9@864.683,482.346
NetM11_10: M11.10 U55.10 | length 49.2
  Top Layer w0.254: v1(834.545,502.313) M11.10@836.168,502.313 ; v1(854.583,481.076) 864.683,481.076 U55.10@864.81,480.949
  Bottom Layer w0.254: v1(834.545,502.313) 847.824,502.313 849.757,500.38 849.757,493.268 854.583,488.442 v1(854.583,481.076)
NetM11_11: M11.11 U55.11 | length 58.3
  Top Layer w0.254: v1(834.136,499.618) 834.136,493.113 M11.11@836.168,493.113 ; v1(853.44,479.679) U55.11@864.81,479.679
  Bottom Layer w0.254: v1(834.136,499.618) 834.136,501.043 847.189,501.043 848.868,499.364 848.868,492.76 853.44,488.188 v1(853.44,479.679)
NetM11_20: M11.20 U55.13 | length 39.3
  Top Layer w0.254: M11.20@847.598,493.113 847.598,491.998 852.17,487.426 852.17,478.746 853.777,477.139 872.74,477.139 U55.13@874.01,478.409
NetM12_1: M12.1 U55.14 | length 40
  Top Layer w0.254: M12.1@847.598,487.708 851.535,483.771 851.535,478.663 853.694,476.504 874.776,476.504 875.919,477.647 875.919,479.044 875.284,479.679 U55.14@874.01,479.679
NetM12_10: M12.10 U55.15 | length 68.2
  Top Layer w0.254: v1(834.235,487.708) M12.10@836.168,487.708 ; U55.15@874.01,480.949 v1(878.205,480.949)
  Bottom Layer w0.254: v1(834.235,487.708) 834.037,487.708 832.739,486.41 832.739,478.028 836.295,474.472 875.157,474.472 878.205,477.52 v1(878.205,480.949)
NetM12_11: M12.11 U55.16 | length 53.7
  Top Layer w0.254: v1(834.418,478.508) M12.11@836.168,478.508 ; U55.16@874.01,482.219 v1(876.681,482.219)
  Bottom Layer w0.254: v1(834.418,478.508) 837.311,475.615 875.284,475.615 876.681,477.012 v1(876.681,482.219)
NetM12_20: M12.20 U55.17 | length 44.8
  Top Layer w0.254: M12.20@847.598,478.508 851.253,474.853 876.427,474.853 879.221,477.647 879.221,482.473 878.205,483.489 U55.17@874.01,483.489
NetR11_1: R11.1 S1.1 | length 4.6
  Top Layer w0.254: S1.1@681.99,469.138 682.586,468.542 R11.1@686.308,468.542
NetU51_4: U51.4 U52.4 | length 31.7
  Top Layer w0.254: U51.4@710.938,509.143 712.47,509.143 712.851,509.524 712.851,531.578 717.34,536.067 U52.4@718.558,536.067
NetU51_5: U51.5 U53.18 | length 25.1
  Top Layer w0.254: U51.5@710.938,507.873 711.835,507.873 712.851,506.857 712.851,488.061 714.756,486.156 U53.18@715.998,486.156
NetU51_6: U51.6 U54.4 | length 281.8
  Top Layer w0.254: v1(707.136,504.444) 709.295,506.603 U51.6@710.938,506.603 ; U54.4@870.085,535.559 870.212,535.432 v1@877.062,535.432
  Bottom Layer w0.254: v1(707.136,504.444) 707.136,481.247 716.578,471.805 752.856,471.805 763.27,482.219 826.258,482.219 835.529,472.948 876.3,472.948 880.491,477.139 880.491,485.267 877.824,487.934 877.824,534.543 v1(876.935,535.432)
NetU51_7: U51.7 U55.18 | length 223.2
  Top Layer w0.254: v1(708.66,502.793) 708.66,503.936 710.057,505.333 U51.7@710.938,505.333 ; U55.18@874.137,484.759 v1@878.84,484.759
  Bottom Layer w0.254: v1(708.66,502.793) 708.66,480.441 716.788,472.313 752.646,472.313 763.06,482.727 826.469,482.727 835.486,473.71 876.3,473.71 879.983,477.393 879.983,483.489 v1(878.713,484.759)
OS0: H11.3 H12.3 H13.3 H14.3 H15.3 H16.3 H31.1 S2.2 | length 479.8
  Top Layer w0.254: S2.2@674.751,567.69 674.751,570.484 H31.1@679.323,575.056 ; H11.3@723.901,593.09 725.297,594.486 764.712,594.486 766.108,593.09 H12.3@767.081,593.09 768.022,593.09 769.153,594.221 770.09,594.221 770.205,594.106 808.101,594.106 809.117,593.09 H13.3@810.26,593.09 811.022,593.09 812.292,594.36 ; H16.3@852.799,433.076 856.621,433.076
  Top Layer w0.508: 812.292,594.36 860.552,594.36 888.873,566.039 888.873,465.328 856.621,433.076
  Bottom Layer w0.254: S2.2@674.751,567.69 678.872,571.811 690.429,571.811 711.708,593.09 H11.3@723.901,593.09 ; H14.3@773.424,433.076 777.615,433.076 778.764,431.927 812.279,431.927 H15.3@813.429,433.076 814.692,434.34 851.535,434.34 H16.3@852.799,433.076
OS1: H11.4 H12.4 H13.4 H14.4 H15.4 H16.4 H31.3 S3.2 | length 472.1
  Top Layer w0.254: S3.2@680.244,567.69 680.244,573.437 H31.3@681.863,575.056 ; H11.4@726.441,593.09 764.819,593.09 765.95,591.959 767.854,591.959 768.985,593.09 H12.4@769.621,593.09 ; H12.4@769.494,593.102 807.872,593.102 809.154,591.82 810.768,591.82 812.05,593.102 H13.4@812.674,593.102 ; H15.4@810.889,433.076 812.292,434.48 848.855,434.48 H16.4@850.259,433.076 851.522,434.34 856.234,434.34
  Top Layer w0.508: H13.4@812.8,593.09 860.298,593.09 887.857,565.531 887.857,465.963 856.234,434.34
  Bottom Layer w0.254: S3.2@680.244,567.69 683.8,571.246 690.626,571.246 711.2,591.82 725.171,591.82 H11.4@726.441,593.09 ; H14.4@770.884,433.076 770.896,433.076 772.287,434.467 778.637,434.467 780.028,433.076 H15.4@810.889,433.076
OS2: H11.5 H12.5 H13.5 H14.5 H15.5 H16.5 H31.5 S4.2 | length 456.2
  Top Layer w0.254: H31.5@684.403,575.056 684.403,569.024 S4.2@685.736,567.69 ; H11.5@723.901,590.55 725.043,591.692 764.922,591.692 766.064,590.55 H12.5@767.081,590.55 767.334,590.55 768.488,591.704 807.975,591.704 809.117,590.562 H13.5@810.134,590.562 ; H13.5@810.26,590.55 810.768,590.55 812.038,591.82 ; H16.5@852.799,435.616 855.224,435.616
  Top Layer w0.508: 812.038,591.82 856.361,591.82 886.968,561.213 886.968,467.36 855.224,435.616
  Bottom Layer w0.254: S4.2@685.736,567.69 688.784,570.738 690.836,570.738 710.648,590.55 H11.5@723.901,590.55 ; H14.5@773.424,435.616 779.139,435.616 780.415,434.34 812.152,434.34 H15.5@813.429,435.616 813.561,435.616 814.825,436.88 851.535,436.88 H16.5@852.799,435.616
P1: H7.1 U50.1 U52.1 U53.23 U54.1 U55.23 | length 361.8
  Top Layer w0.254: U53.23@715.998,479.806 H7.1@699.389,479.806 696.468,482.727 696.468,496.264 698.921,498.717 701.79,498.717 703.072,499.999 703.072,510.711 706.628,514.267 706.628,530.352 716.153,539.877 U52.1@718.558,539.877 ; U54.1@870.085,531.749 870.085,531.741 876.173,525.653 876.173,491.109 ; U55.23@874.042,491.109 876.173,491.109 ; v1(882.65,491.109) 876.173,491.109
  Bottom Layer w0.254: U50.1@694.436,479.806 H7.1@699.389,479.806 709.422,469.773 753.872,469.773 764.286,480.187 825.246,480.187 834.517,470.916 877.864,470.916 884.936,477.988 884.936,489.033 882.86,491.109 v1(882.65,491.109)
P2: H7.2 U50.2 U52.2 U53.22 U54.2 U55.22 | length 365.7
  Top Layer w0.254: U53.22@715.998,481.076 700.659,481.076 H7.2@699.389,482.346 696.976,484.759 696.976,494.232 699.008,496.264 699.008,496.316 701.294,496.316 703.707,498.729 703.707,510.627 707.517,514.437 707.517,529.717 716.407,538.607 U52.2@718.558,538.607 ; U54.2@870.085,533.019 876.554,533.019 878.967,530.606 v1(880.745,530.606) ; U55.22@874.042,489.839 v1(880.745,489.839)
  Bottom Layer w0.254: U50.2@694.436,482.346 H7.2@699.389,482.346 711.454,470.281 753.531,470.281 763.945,480.695 825.627,480.695 834.898,471.424 877.653,471.424 884.428,478.199 884.428,488.823 883.412,489.839 v1(880.745,489.839) v1(880.745,530.606)
P3: H7.3 U50.3 U52.3 U53.21 U54.3 U55.21 | length 364.7
  Top Layer w0.254: U53.21@715.998,482.346 701.929,482.346 H7.3@699.389,484.886 697.484,486.791 697.484,492.2 698.921,493.637 701.282,493.637 704.215,496.57 704.215,509.143 708.627,513.555 708.627,528.861 717.103,537.337 U52.3@718.558,537.337 ; U54.3@870.085,534.289 878.84,534.289 v1(879.348,533.781) ; U55.21@874.042,488.569 v1(883.031,488.569)
  Bottom Layer w0.254: U50.3@694.436,484.886 H7.3@699.389,484.886 713.486,470.789 753.32,470.789 763.734,481.203 825.837,481.203 835.108,471.932 877.443,471.932 883.114,477.603 883.114,488.486 v1(883.031,488.569) 880.237,488.569 879.348,489.458 v1(879.348,533.781)
P4: H7.4 U50.4 U53.20 U55.20 | length 240.5
  Top Layer w0.254: H7.4@699.389,487.426 703.199,483.616 U53.20@715.998,483.616 ; U55.20@874.042,487.299 v1(881.126,487.299)
  Bottom Layer w0.254: U50.4@694.436,487.426 H7.4@699.389,487.426 715.518,471.297 753.11,471.297 763.524,481.711 826.048,481.711 835.319,472.44 877.145,472.44 882.606,477.901 882.606,485.819 v1(881.126,487.299)
P5: H7.5 U50.5 U51.2 | length 32.9
  Top Layer w0.254: H7.5@699.389,489.966 704.977,495.554 704.977,508.127 708.533,511.683 U51.2@710.938,511.683
  Bottom Layer w0.254: U50.5@694.436,489.966 H7.5@699.389,489.966